# Altium PCB PCB4.PcbDoc
Units mil, origin at the board's own origin, x right, y up, seen from the top; angles counter-clockwise.
Board outline 6535.43 x 4330.71 mil, 2 copper layers (Top Layer, Bottom Layer); 138 components, 60 nets, 332 pads, 80 vias.
Unrouted connection lines stored in the file: 2.
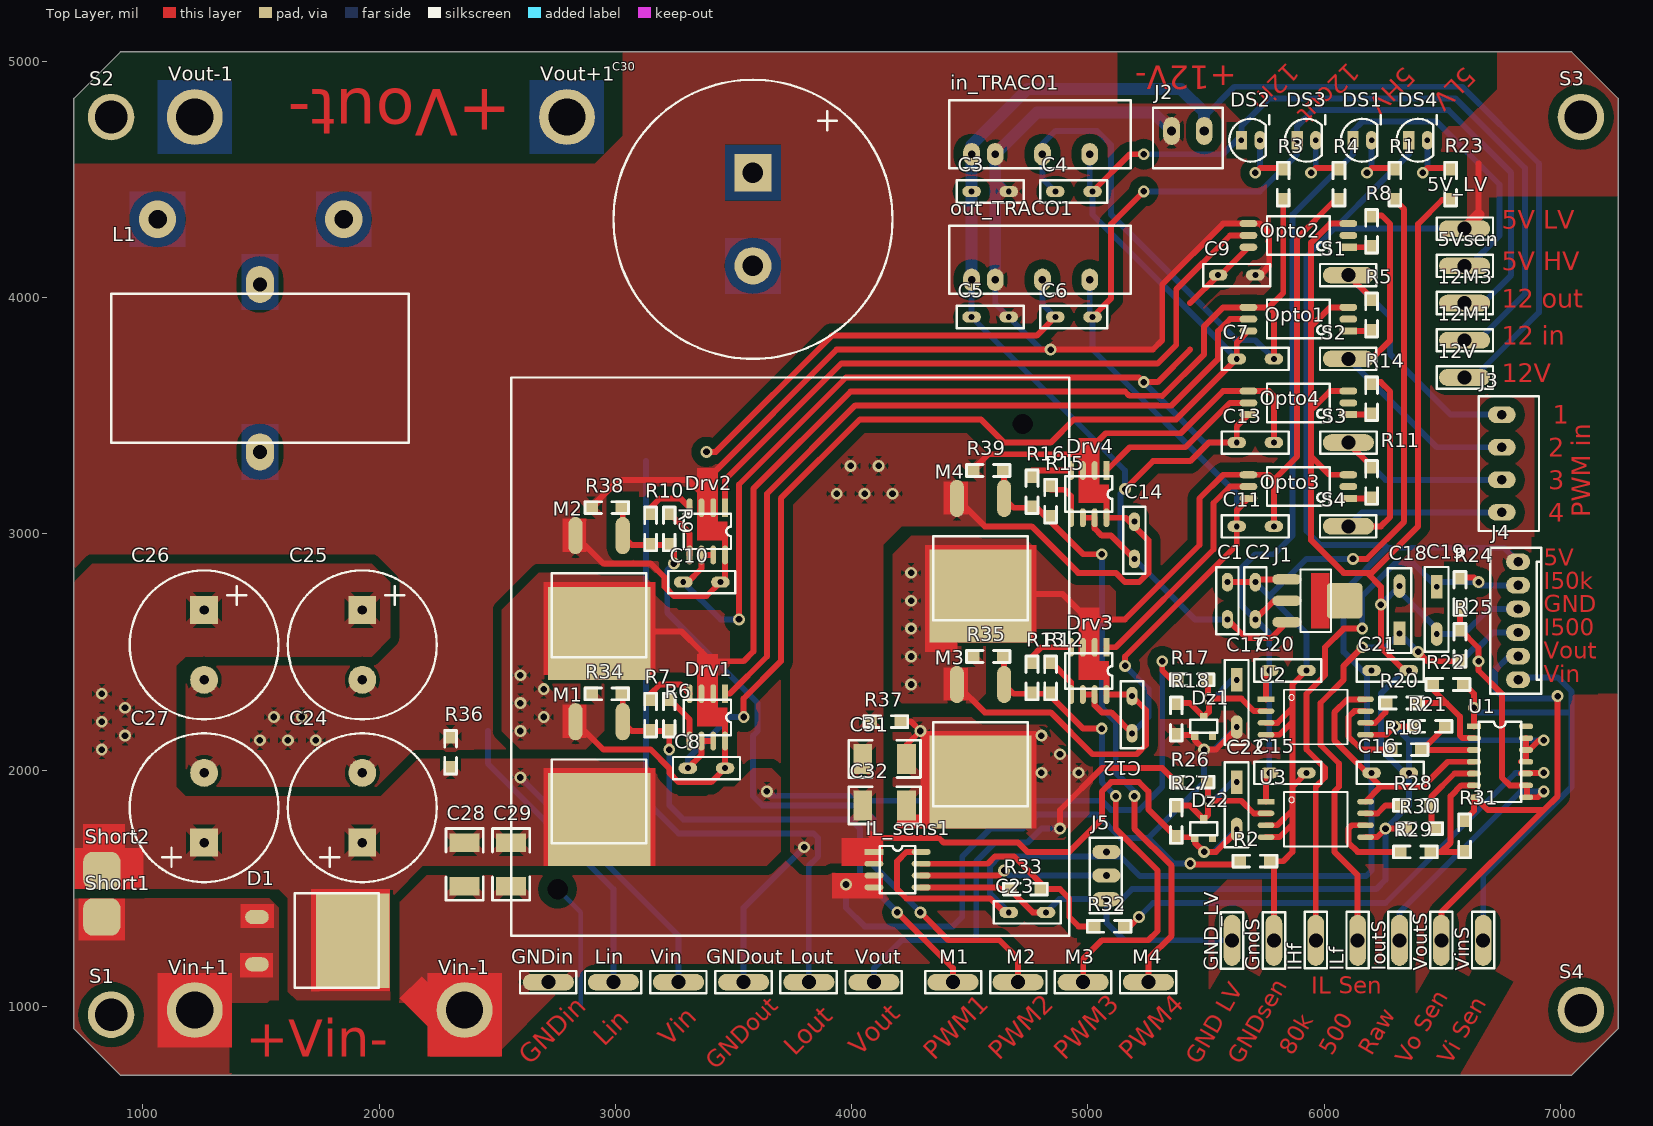
[diagram p0: Top Layer view]
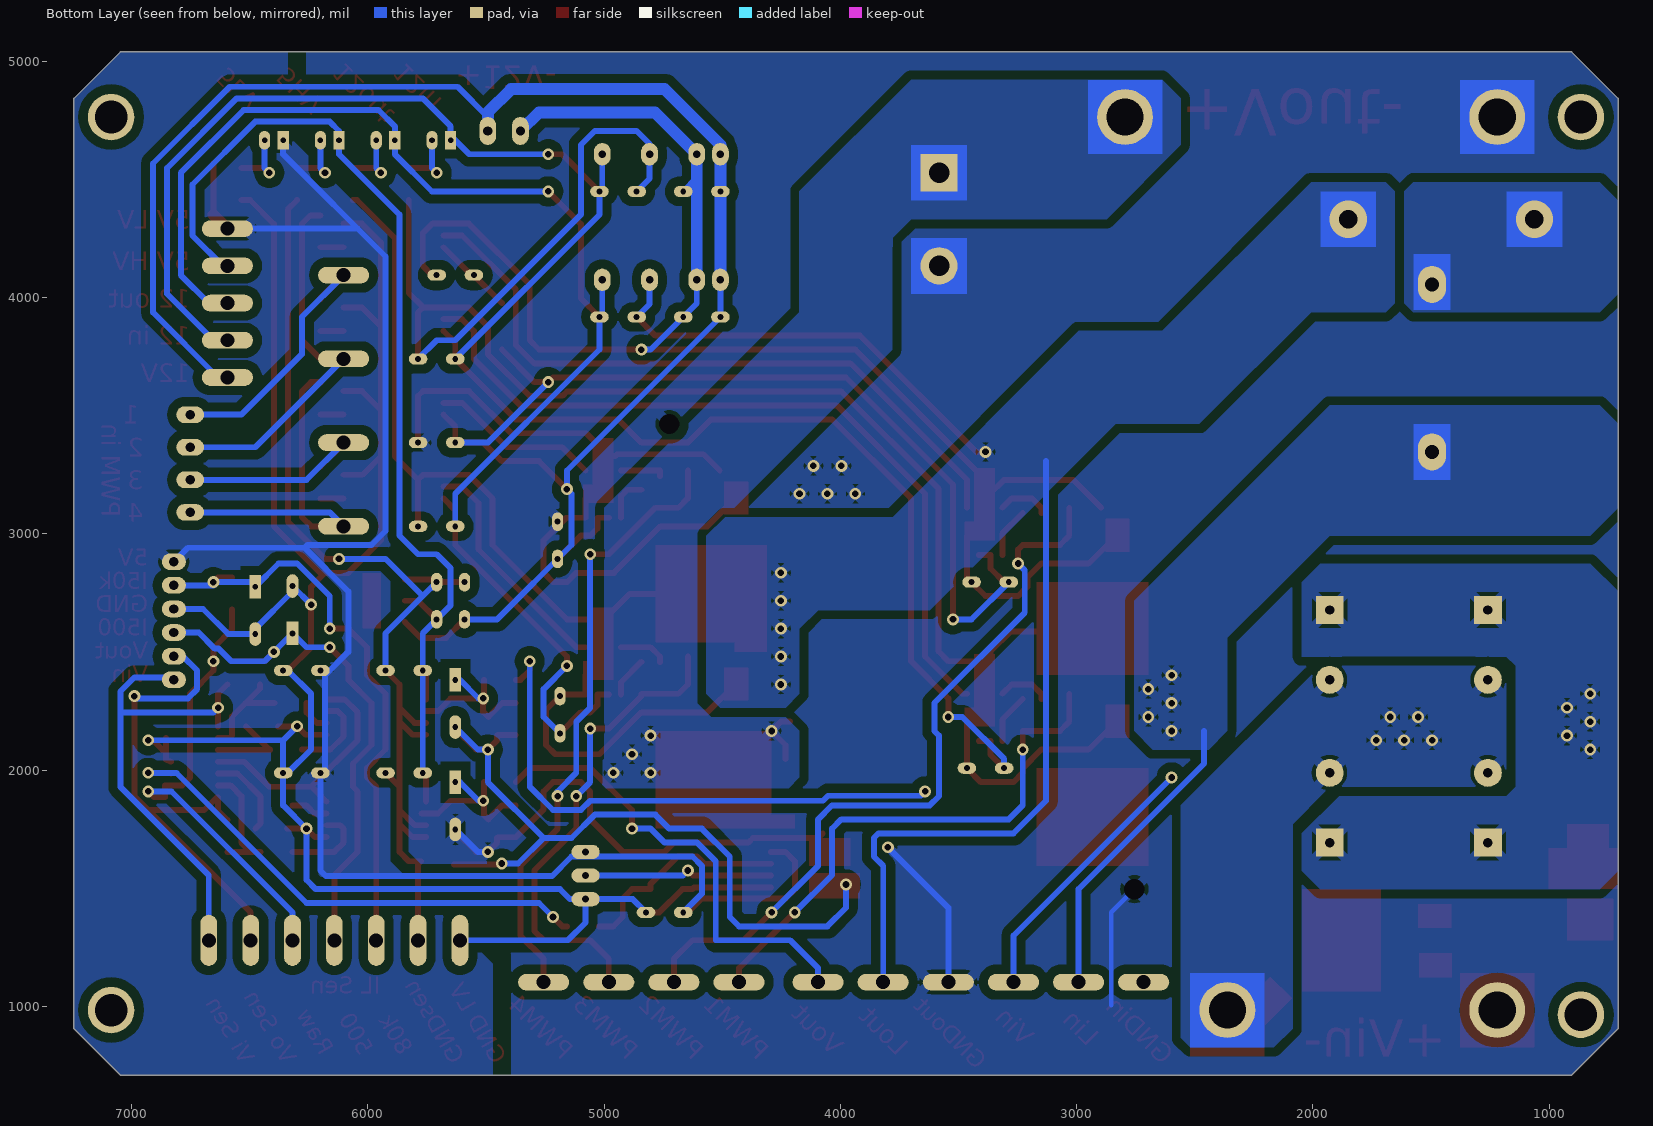
[diagram p1: Bottom Layer view, seen from below]

## Layer stack, top to bottom
Top Solder: solder mask 0.4, Solder Resist, Dk 3.5
Top Layer: signal copper 1.4
Dielectric 1: dielectric 12.6, FR-4, Dk 4.8
Bottom Layer: signal copper 1.4
Bottom Solder: solder mask 0.4, Solder Resist, Dk 3.5

## Board outline
708.66,4842.52 905.51,5039.37 7047.24,5039.37 7244.09,4842.52 7244.09,905.51 7047.24,708.66 905.51,708.66 708.66,905.51

## Design rules (kind name [scope] priority, off if disabled: settings)
Clearance "Polygon Pour" [InPolygon] p1: gap=39.37
Clearance [All] p2: gap=15.75
Clearance Defoult [InNet('No Net') And OnLayer('Top Layer')] p3: gap=15.75
PlaneConnect [All] p1: planeconnectstyle=Direct reliefexpansion=20 reliefentries=4 reliefconductorwidth=10 reliefairgap=10
PolygonConnect [All] p1: connectstyle=Relief reliefconductorwidth=39.37 reliefentries=4 polygonreliefangle="45 Angle" airgapwidth=15.75
RoutingVias [All] p1: holewidth=28 width=78.74 viastyle="Through Hole" minholewidth=28 minwidth=78.74 maxholewidth=28 maxwidth=78.74
SolderMaskExpansion [All] p1: expansion=4
UnConnectedPin [All] p1:
Width [All] p1: maxlimit=393.7 minlimit=19.68 preferedwidth=393.7
29 further rules are at their usual default settings.

## Classes and differential pairs
component class Switches: C24 C25 C26 C27 C28 C29 C30 C31 C32 D1 L1 M1 M2 M3 M4 R34 R35 R36 R37 R38 R39 S1 S2 S3 S4 Short1 Short2 Vin+1 Vin-1 Vout+1 Vout-1
component class Power_supplies: 5V_LV 5Vsen 12M1 12M3 12V C1 C2 C3 C4 C5 C6 DS1 DS2 DS3 GND_LV GNDin GNDout GndS in_TRACO1 J1 J2 Lin Lout out_TRACO1 R1 R2 R3 R4 Vin Vout
component class Drivers: C7 C8 C9 C10 C11 C12 C13 C14 C? Drv1 Drv2 Drv3 Drv4 IC? J3 M1 M2 M3 M4 Opto1 Opto2 Opto3 Opto4 R5 R6 R7 R8 R9 R10 R11 R12 R13 R14 R15 R16 S1 S2 S3 S4
component class Signal_processing: B? C15 C16 C17 C18 C19 C20 C21 C22 C23 DS4 Dz1 Dz2 IHf IL_sens1 ILf IoutS J4 J5 R17 R18 R19 R20 R21 R22 R23 R24 R25 R26 R27 R28 R29 R30 R31 R32 R33 U1 U2 U3 U? VinS VoutS

## Components (designator, comment, footprint, x,y, rotation, side; value= is the part's Value field where it differs from the comment)
5V_LV "Test Point" TEST_POINT 6594.49,4291.34 r270 top
5Vsen "Test Point" TEST_POINT 6594.49,4133.86 r270 top
12M1 "Test Point" TEST_POINT 6594.49,3818.9 r270 top
12M3 "Test Point" TEST_POINT 6594.49,3976.38 r270 top
12V "Test Point" TEST_POINT 6594.49,3661.42 r270 top
C1 "100nF" CAP100NF_AAU 5590.55,2795.28 r270 top
C2 "100nF" CAP100NF_AAU 5708.66,2795.28 r270 top
C3 "100nF" CAP100NF_AAU 4665.35,4448.82 r180 top
C4 "100nF" CAP100NF_AAU 5019.69,4448.82 r180 top
C5 "100nF" CAP100NF_AAU 4665.35,3917.32 r180 top
C6 "100nF" CAP100NF_AAU 5019.69,3917.32 r180 top
C7 "100nF" CAP100NF_AAU 5629.92,3740.16 r0 top
C8 "100nF" CAP100NF_AAU 3464.57,2007.87 r180 top
C9 "100nF" CAP100NF_AAU 5551.18,4094.49 r0 top
C10 "100nF" CAP100NF_AAU 3444.88,2795.28 r180 top
C11 "100nF" CAP100NF_AAU 5629.92,3031.5 r0 top
C12 "100nF" CAP100NF_AAU 5187.01,2312.99 r270 top
C13 "100nF" CAP100NF_AAU 5629.92,3385.83 r0 top
C14 "100nF" CAP100NF_AAU 5196.85,3051.18 r270 top
C15 "100nF" CAP100NF_AAU 5925.2,1988.19 r180 top
C16 "100nF" CAP100NF_AAU 6358.27,1988.19 r180 top
C17 "6.6nF" "CONDENSADOR_MKP_200MILIS - DUPLICATE" 5629.92,2381.89 r270 top
C18 "4.7nF" "CONDENSADOR_MKP_200MILIS - DUPLICATE" 6318.9,2578.74 r90 top
C19 "470pF" "CONDENSADOR_MKP_200MILIS - DUPLICATE" 6476.38,2775.59 r270 top
C20 "100nF" CAP100NF_AAU 5925.2,2421.26 r180 top
C21 "100nF" CAP100NF_AAU 6358.27,2421.26 r180 top
C22 "2.7nF" "CONDENSADOR_MKP_200MILIS - DUPLICATE" 5629.92,1948.82 r270 top
C23 "100nF" CAP100NF_AAU 4822.83,1397.64 r180 top
C24 "470µF" CE_16DX35MM_PITCH7.5MM 1929.13,1692.91 r90 top
C25 "470µF" CE_16DX35MM_PITCH7.5MM 1929.13,2677.17 r270 top
C26 "470µF" CE_16DX35MM_PITCH7.5MM 1259.84,2677.17 r270 top
C27 "470µF" CE_16DX35MM_PITCH7.5MM 1259.84,1692.91 r90 top
C28 "100nF" 1812 2362.2,1692.91 r270 top
C29 "1uF" 1812 2559.06,1692.91 r270 top
C30 "820µF" CE_30DX35MM_PITCH10MM 3582.68,4527.56 r270 top
C31 "100nF" 1812 4232.28,2047.24 r180 top
C32 "1uF" 1812 4232.28,1850.39 r180 top
D1 "????" "D2PAK - DIODE" 1483.47,1377.95 r270 top
Drv1 "NCP81074A" NCP81074A 3464.57,2322.83 r270 top
Drv2 "NCP81074A" NCP81074A 3464.57,3110.24 r270 top
Drv3 "NCP81074A" NCP81074A 5078.74,2519.69 r270 top
Drv4 "NCP81074A" NCP81074A 5078.74,3267.72 r270 top
DS1 "Verde" "LED 2MM" 6200.79,4665.35 r270 top
DS2 "Verde" "LED 2MM" 5728.35,4665.35 r270 top
DS3 "Verde" "LED 2MM" 5964.57,4665.35 r270 top
DS4 "Verde" "LED 2MM" 6437.01,4665.35 r270 top
Dz1 "4.7V" "SOT23 - ZENNER" 5452.76,2145.67 r0 top
Dz2 "4.7V" "SOT23 - ZENNER" 5452.76,1712.6 r0 top
GND_LV "Test Point" TEST_POINT 5610.24,1279.53 r180 top
GNDin "Test Point" TEST_POINT 2716.54,1102.36 r90 top
GNDout "Test Point" TEST_POINT 3543.31,1102.36 r90 top
GndS "Test Point" TEST_POINT 5787.4,1279.53 r180 top
IHf "Test Point" TEST_POINT 5964.57,1279.53 r0 top
IL_sens1 "ACS723LLCTR-20AB-T" SOIC8_GND 4094.49,1653.54 r0 top
ILf "Test Point" TEST_POINT 6141.73,1279.53 r0 top
in_TRACO1 "TRACO" TRACO_TMA1212S 4507.87,4606.3 r0 top
IoutS "Test Point" TEST_POINT 6318.9,1279.53 r0 top
J1 "LD1117" SOT-223_LM1117 5964.57,2716.54 r270 top
J2 "Cleva 2 vias" "CON2_EXTRON _3.5MMPITCH" 5354.33,4704.72 r0 top
J3 "CON4" "CON4_EXTRON _3.5MMPITCH" 6751.97,3090.55 r90 top
J4 "CON6" CON6_KK_256 6820.87,2381.89 r90 top
J5 "Cleva 2 vias" CON_3_100MILIS 5078.74,1653.54 r0 top
L1 "mH" TORUS_COIL_1MH 1496.06,3346.46 r90 top
Lin "Test Point" TEST_POINT 2992.13,1102.36 r90 top
Lout "Test Point" TEST_POINT 3818.9,1102.36 r90 top
M1 "Test Point" TEST_POINT 4429.13,1102.36 r270 top
M1 "MOSFET N" "D2PAK - MOSFET" 3031.5,2204.72 r180 top
M2 "MOSFET N" "D2PAK - MOSFET" 3031.5,2992.13 r180 top
M2 "Test Point" TEST_POINT 4704.72,1102.36 r270 top
M3 "MOSFET N" "D2PAK - MOSFET" 4645.67,2362.2 r180 top
M3 "Test Point" TEST_POINT 4980.31,1102.36 r90 top
M4 "MOSFET N" "D2PAK - MOSFET" 4645.67,3149.61 r180 top
M4 "Test Point" TEST_POINT 5255.91,1102.36 r90 top
Opto1 "ACPL-W70L" SSOIC6 6102.36,3858.27 r180 top
Opto2 "ACPL-W70L" SSOIC6 6102.36,4212.6 r180 top
Opto3 "ACPL-W70L" SSOIC6 6102.36,3149.61 r180 top
Opto4 "ACPL-W70L" SSOIC6 6102.36,3503.94 r180 top
out_TRACO1 "TRACO" TRACO_TMA1212S 4507.87,4074.8 r0 top
R1 "RK" 1206 6299.21,4547.24 r270 top
R2 "Res. Bridge" 1206 5639.76,1614.17 r0 top
R3 "RK" 1206 5826.77,4547.24 r270 top
R4 "RK" 1206 6062.99,4547.24 r270 top
R5 "560OHM" 1206 6200.79,3858.27 r90 top
R6 "25" 1206 3228.35,2165.35 r90 top
R7 "25" 1206 3149.61,2165.35 r90 top
R8 "560OHM" 1206 6200.79,4212.6 r90 top
R9 "560OHM" 1206 3228.35,2952.76 r90 top
R10 "560OHM" 1206 3149.61,2952.76 r90 top
R11 "560OHM" 1206 6200.79,3149.61 r90 top
R12 "560OHM" 1206 4842.52,2322.83 r90 top
R13 "560OHM" 1206 4763.78,2322.83 r90 top
R14 "560OHM" 1206 6200.79,3503.94 r90 top
R15 "560OHM" 1206 4842.52,3070.87 r90 top
R16 "560OHM" 1206 4763.78,3110.24 r90 top
R17 "47k" 1206 5374.02,2381.89 r0 top
R18 "2k" 1206 5374.02,2283.46 r270 top
R19 "11k" 1206 6279.53,2086.61 r0 top
R20 "11k" 1206 6259.84,2283.46 r0 top
R21 "27k" 1206 6515.75,2185.04 r180 top
R22 "27k" 1206 6456.69,2362.2 r0 top
R23 "RK" 1206 6535.43,4547.24 r270 top
R24 "6k8" 1206 6574.8,2814.96 r270 top
R25 "68k" 1206 6574.8,2460.63 r90 top
R26 "120k" 1206 5374.02,1948.82 r0 top
R27 "2k" 1206 5374.02,1850.39 r270 top
R28 "11k" 1206 6318.9,1850.39 r0 top
R29 "11k" 1206 6318.9,1653.54 r0 top
R30 "27k" 1206 6476.38,1751.97 r180 top
R31 "27k" 1206 6594.49,1653.54 r90 top
R32 "10k" 1206 5157.48,1338.58 r180 top
R33 "10k" 1206 4803.15,1496.06 r180 top
R34 "68K" 1206 3031.5,2322.83 r180 top
R35 "68K" 1206 4645.67,2480.32 r180 top
R36 "33K" 1206 2303.15,2007.87 r90 top
R37 "47K" 1206 4212.6,2204.72 r180 top
R38 "68K" 1206 3031.5,3110.24 r180 top
R39 "68K" 1206 4645.67,3267.72 r180 top
S1 "Support" SUPPORT 866.14,964.57 r0 top
S1 "Test Point" TEST_POINT 6102.36,4094.49 r90 top
S2 "Support" SUPPORT 866.14,4763.78 r0 top
S2 "Test Point" TEST_POINT 6102.36,3740.16 r90 top
S3 "Support" SUPPORT 7086.61,4763.78 r0 top
S3 "Test Point" TEST_POINT 6102.36,3385.83 r270 top
S4 "Support" SUPPORT 7086.61,984.25 r0 top
S4 "Test Point" TEST_POINT 6102.36,3031.5 r90 top
Short1 "CON1" SHORTPAD 826.77,1377.95 r90 top
Short2 "CON1" SHORTPAD 826.77,1574.8 r90 top
U1 "LMC6484IM" SOIC_14 6633.86,2185.04 r0 top
U2 "ACPL-C870-000E" SSOP8 5964.57,2224.41 r0 top
U3 "ACPL-C870-000E" SSOP8 5964.57,1791.34 r0 top
Vin "Test Point" TEST_POINT 3267.72,1102.36 r90 top
Vin+1 "CON1" POWERHOLE 1220.47,984.25 r0 top
Vin-1 "CON1" POWERHOLE 2362.2,984.25 r0 top
VinS "Test Point" TEST_POINT 6673.23,1279.53 r0 top
Vout "Test Point" TEST_POINT 4094.49,1102.36 r90 top
Vout+1 "CON1" POWERHOLE 2795.28,4763.78 r0 top
Vout-1 "CON1" POWERHOLE 1220.47,4763.78 r0 top
VoutS "Test Point" TEST_POINT 6496.06,1279.53 r0 top

## Footprints (in the part's own frame and the unit in brackets; to place one, negate y for a bottom-side part, rotate by r counter-clockwise, add the part's x,y. Pads: shape width x height; smd on the part's side, far side on the other; paste and mask are expansions set on the pad)
1206 [mil] "SMD R&C"
  rect 60x60 smd: 1(0,0) 2(135,0)
  silkscreen extent -25,-25 160,25, body extent 2,-31 128,31
1812 [mm]
  rect 2x3.2 smd: 1(0,0) 2(4.7,0)
  silkscreen extent -1.5,-2 6.2,2
CAP100NF_AAU [mm] "10nF 1600v"
  oval 2x1.2 hole 0.635: 1(0,0) 2(4,0)
  silkscreen extent -1.6,-1.2 5.6,1.2
CE_16DX35MM_PITCH7.5MM [mm]
  rect 3x3 hole 1: 1(0,0)
  round 3 hole 1: 2(7.5,0)
  silkscreen extent -4.25,-8 11.75,8
CE_30DX35MM_PITCH10MM [mm]
  rect 4x4 hole 2.2: 1(0,0)
  round 4 hole 2.2: 2(10,0)
  silkscreen extent -10,-15 20,15
"CON2_EXTRON _3.5MMPITCH" [mm]
  oval 1.8x3 hole 1: 1(0,0) 2(3.5,0)
  silkscreen extent -2,-4 5.5,2.5
"CON4_EXTRON _3.5MMPITCH" [mm]
  oval 1.8x3 hole 1: 1(0,0) 2(3.5,0) 3(7,0) 4(10.5,0)
  silkscreen extent -2,-4 12.5,2.5
CON6_KK_256 [mm]
  oval 1.8x2.6 hole 1: 1(0,0) 2(2.54,0) 3(5.08,0) 4(7.62,0) 5(10.16,0) 6(12.7,0)
  silkscreen extent -1.5,-2.5 14.2,3
CON_3_100MILIS [mil]
  oval 120x60 hole 29.53: 1(0,0) 2(0,-100) 3(0,-200)
  silkscreen extent -70,-260 65,60
"CONDENSADOR_MKP_200MILIS - DUPLICATE" [mil] "10nF 1600v"
  rect 100x50 hole 25: 1(0,0)
  oval 100x50 hole 25: 2(200,0)
  silkscreen extent -84,-50 275,50
"D2PAK - DIODE" [mil] "TO220-superficie"
  oval 60x100 smd: A(0,0) A(200,0)
  rect 400x310 smd: K(100,405)
  silkscreen extent -100,160 300,515
"D2PAK - MOSFET" [mm] "TO220-superficie"
  rect 11x10 smd: D(2.54,10.5)
  oval 1.524x4 smd: G(0,0) S(5.08,0)
  silkscreen extent -2.54,4.06 7.62,13.08
"LED 2MM" [mm] "no está modificado"
  rect 2x1.2 hole 0.6: A(0,-2)
  oval 2x1.2 hole 0.6: K(0,0)
  silkscreen extent -2.72,-3.3 2.3,1
NCP81074A [mil] "Driver"
  rect 80x25 smd: 1(0,0)
  oval 80x25 smd: 2(0,-50) 3(0,-100) 4(0,-150) 5(200,-150) 6(200,-100) 7(200,-50) 8(200,0)
  silkscreen extent 25,-175 175,25
POWERHOLE [mm]
  round 6 hole 4: 1(0,0)
SHORTPAD [mm]
  rrect50% 4x4 smd: 1(0,0)
SOIC8_GND [mil] "Con plano de masa inferior"
  rect 80x25 smd: 1(0,0)
  oval 80x25 smd: 2(0,-50) 3(0,-100) 4(0,-150) 5(200,-150) 6(200,-100) 7(200,-50) 8(200,0)
  silkscreen extent 25,-175 175,25
SOIC_14 [mil]
  rect 60x24 smd: 1(0,0)
  oval 60x24 smd: 2(0,-50) 3(0,-100) 4(0,-150) 5(0,-200) 6(0,-250) 7(0,-300) 8(220.47,-300) 9(220.47,-250) 10(220.47,-200) 11(220.47,-150) 12(220.47,-100) 13(220.47,-50) 14(220.47,0)
  silkscreen extent 20,-320 201,20
"SOT23 - ZENNER" [mm] "Transistor SMD"
  rect 0.8x0.9 smd: A(0,0) K(0.95,2) NC(1.9,0)
  silkscreen extent -0.5,0.3 2.4,1.7
SOT-223_LM1117 [mm] "SOT-223/SC-73; 4 Leads; Body 6.7 x 7.3 mm, inc. leads (LxW max)"
  oval 1.1x3.15 smd: 1(-2.3,-3.1) 2(0,-3.1) 3(2.3,-3.1)
  rrect20% 3.8x3.8 smd: ""(0,3.1)
  silkscreen extent -3.35,-1.63 3.35,1.63
SSOIC6 [mm] "Circuito de 6 patas SMD"
  rect 1.91x0.762 smd: 1(0,0)
  oval 1.91x0.762 smd: 2(0,-1.27) 3(0,-2.54) 4(10.74,-2.54) 5(10.74,-1.27) 6(10.74,0)
  silkscreen extent 2,-3.34 8.74,0.8
SSOP8 [mm]
  rect 1.8x0.6 smd: 1(-5.35,1.905)
  oval 1.8x0.6 smd: 2(-5.35,0.635) 3(-5.35,-0.635) 4(-5.35,-1.905) 5(5.35,-1.905) 6(5.35,-0.635) 7(5.35,0.635) 8(5.35,1.905)
  silkscreen extent -3.4,-2.93 3.4,2.93
SUPPORT [mm]
  round 5 hole 3.5: ""(0,0)
TEST_POINT [mm]
  oval 1.8x5.5 hole 1.5: 1(0,0)
  silkscreen extent -1.2,-3 1.2,3.05
TORUS_COIL_1MH [mm]
  oval 4x3 hole 1.5: 1(0,0) 2(18,0)
  silkscreen extent 1,-16 17,16
TRACO_TMA1212S [mm]
  oval 1.8x2.4 hole 0.8: 1(0,0) 2(2.54,0) 4(7.62,0) 6(12.7,0)
  silkscreen extent -2.4,-1.5 17.1,5.8

## Part data
C1 C2 C3 C4 C5 C6 C7 C8 C9 C10 C11 C12 C13 C14 C15 C16 C17 C18 C19 C20 C21 C22 C23 C28 C29 C31 C32: library part Condensador, "Condensador"
C24 C25 C26 C27 C30: library part Cond_Electrolítico, "Condensador Aluminio con polaridad"
D1: library part Diodo, "Diodo"
DS1 DS2 DS3 DS4: library part Led
Dz1 Dz2: library part Zener
IL_sens1: "Current Sensor AC/DC 5V 8-Pin SOIC N Allegro Microsystems ACS723LLCTR-20AB-T, Current Sensor, 8-Pin, SOIC"
in_TRACO1 out_TRACO1: "TracoPower TMA1212S"
J1: "Linear voltage regulator"
J2: library part Con_2
J4: "CONECTOR 6 PINES"
J5: library part Con_3
L1: library part Bobina
M1 M2 M3 M4: "MOSFET de canal N"
R1 R3 R4 R5 R6 R7 R8 R9 R10 R11 R12 R13 R14 R15 R16 R17 R18 R19 R20 R21 R22 R23 R24 R25 R26 R27 R28 R29 R30 R31 R32 R33 R34 R35 R36 R37 R38 R39: library part Resistencia, "Resistencia"
R2: "Resistencia Bridge"
U1: library part LMC6484IM_1, "14 pin CMOS Quad Rail to Rail Input and Output Operational Amplifier 55 per tube"
U2 U3: "Isolation Amplifier [Broadcom] ACPL-C870-000E Isolation Amplifier"

## Free pads (board coordinates)
  round 20 hole 86.61: 2(2755.91,1496.06) 2(4724.41,3464.57)

## Via types
v1: diameter 50, hole 28, Top Layer to Bottom Layer, 78 vias
v2: diameter 157.48, hole 78.74, Top Layer to Bottom Layer, 2 vias

## Nets (pads, with @x,y where several pads share a name; then routed paths per layer and width w, separated by ;. In a path a pad name is that pad's centre, name@x,y a point inside that pad or via, vN(x,y) a via of type N, cw(c..) or ccw(c..) an arc to the next point about the centre after c; other vN are vias at no path point)
5V_HV: 5Vsen.1 C2.2 C15.2 C20.2 DS1.A J1.2 U2.1 U3.1 | length 4553.1
  Top Layer w25: C2.2 5787.4,2716.54 J1.2 ; U3.1 5753.94,1974.41 C15.2 ; U2.1 5753.94,2407.48 C20.2
  Bottom Layer w25: C15.2 C20.2 5767.72,2578.74 C2.2 5649.61,2696.85 5649.61,2854.33 5708.66,2913.39 5787.4,2913.39 5866.14,2992.13 5866.14,4350.39 6122.05,4606.3 DS1.A@6122.05,4625.98 ; DS1.A 6122.05,4704.72 6161.42,4744.09 6476.38,4744.09 6742.13,4478.35 6742.13,4261.81 6614.17,4133.86 5Vsen.1
5V_LV: 5V_LV.1 C16.2 C21.2 C23.2 DS4.A IL_sens1.8 J4.6 J5.1 U1.4 U2.8 U3.8 | length 8929.5
  Top Layer w25: IL_sens1.8 4232.28,1653.54 4192.91,1614.17 4192.91,1496.06 4232.28,1456.69 4586.61,1456.69 4645.67,1397.64 C23.2 ; U2.8 6098.62,2299.41 6043.31,2244.09 6043.31,2125.98 6239.07,1930.22 U3.8 6237.99,1929.13 6417.32,1929.13 6523.23,2035.04 U1.4 ; 6653.54,4350.39 6653.54,4566.93
  Top Layer w50: 5V_LV.1 6653.54,4350.39
  Bottom Layer w25: C23.2 4586.61,1476.38 4586.61,1594.49 4625.98,1633.86 5137.8,1633.86 5220.57,1551.08 6177.07,1551.08 6200.79,1574.8 6200.79,1968.5 6181.1,1988.19 6181.1,2401.57 6082.68,2500 6082.68,2755.91 6267.72,2940.95 ; 6043.31,4291.34 5V_LV.1 ; DS4.A@6358.27,4625.98 6358.27,4606.3 5925.2,4173.23 5925.2,3011.81 5984.25,2952.76 6255.91,2952.76 6267.72,2940.95 ; J4.6@6842.52,2881.89 J4.6 6761.81,2940.95 6267.72,2940.95
12V_HV_HS_IN: 12M1.1 C4.1 C7.1 C8.2 Drv1.6 Drv1.7 DS2.A in_TRACO1.6 Opto1.6 | length 8073.7
  Top Layer w25: C8.2 3364.57,2065.35 Drv1.6 Drv1.7 ; v1(3543.31,2224.41) 3543.31,2303.15 3700.79,2460.63 3700.79,3149.61 4035.43,3484.25 4547.24,3484.25 4645.67,3385.83 4842.52,3385.83 4940.94,3484.25 5374.02,3484.25 C7.1 5629.92,3808.66 Opto1.6 ; C4.1 5177.17,4606.3 v1(5236.22,4606.3)
  Bottom Layer w25: C8.2 3307.09,2047.24 3484.25,2224.41 v1(3543.31,2224.41) ; in_TRACO1.6 5007.87,4460.63 C4.1 5019.69,4350.39 C7.1 ; v1(5236.22,4606.3) 5570.87,4606.3 DS2.A@5649.61,4685.04 ; DS2.A 5649.61,4724.41 5767.72,4842.52 6555.12,4842.52 6850.39,4547.24 6850.39,4015.75 6653.54,3818.9 12M1.1
12V_HV_HS_OUT: 12M3.1 C6.1 C11.1 C12.2 Drv3.6 Drv3.7 DS3.A Opto3.6 out_TRACO1.6 | length 6001.5
  Top Layer w25: Drv3.6 Drv3.7 5028.74,2274.41 5059.06,2244.09 5098.43,2244.09 C12.2 ; C6.1 5098.43,3996.06 5098.43,4311.02 v1(5236.22,4448.82) ; v1(5157.48,2440.94) 5157.48,2480.32 5629.92,2952.76 C11.1 5629.92,3100 Opto3.6
  Bottom Layer w25: out_TRACO1.6 5007.87,3929.13 C6.1 5019.69,3779.53 5629.92,3169.29 C11.1 ; v1(5157.48,2440.94) 5255.91,2342.52 5255.91,2224.41 C12.2 ; v1(5236.22,4448.82) 5728.35,4448.82 5885.83,4606.3 DS3.A 5885.83,4724.41 5954.72,4793.31 6525.59,4793.31 6791.34,4527.56 6791.34,4094.49 12M3.1@6673.23,3976.38 ; 12M3.1 12M3.1@6614.17,3976.38
12V_HV_LS: 12V.1 C1.2 C3.2 C5.2 C9.1 C10.2 C13.1 C14.2 Drv2.6 Drv2.7 Drv4.6 Drv4.7 in_TRACO1.1 J1.3 J2.2 Opto2.6 Opto4.6 out_TRACO1.1 | length 11753
  Top Layer w25: C10.2@3307.09,2795.28 3364.57,2852.76 Drv2.6 Drv2.7 ; v1(3523.62,2637.8) 3523.62,3208.66 3976.38,3661.42 5216.54,3661.42 v1(5236.22,3641.73) 5295.28,3641.73 5433.07,3779.53 ; Drv4.6 Drv4.7 5028.74,3022.44 5059.06,2992.13 5098.43,2992.13 C14.2 ; v1(5157.48,3188.98) 5275.59,3307.09 5433.07,3307.09 5511.81,3385.83 C13.1 5629.92,3454.33 Opto4.6 ; 5433.07,3976.38 C9.1 ; C9.1@5551.18,4084.25 Opto2.6 ; C1.2 5669.29,2559.06 5775.59,2559.06 J1.3
  Bottom Layer w25: C10.2 3444.88,2637.8 v1(3523.62,2637.8) ; out_TRACO1.1 C5.2 5157.48,3267.72 v1(5157.48,3188.98) 5137.8,3169.29 5137.8,2952.76 5452.76,2637.8 C1.2 ; v1(5236.22,3641.73) 5492.13,3385.83 C13.1 ; 5492.13,4763.78 5620.08,4891.73 6584.65,4891.73 6909.45,4566.93 6909.45,3937.01 6633.86,3661.42 12V.1
  Bottom Layer w50: out_TRACO1.1 C3.2 in_TRACO1.1 4507.87,4645.67 4744.09,4881.89 5393.7,4881.89 5492.13,4783.46 5492.13,4763.78
GND_HV_HS_IN: C4.2 C7.2 C8.1 Drv1.2 Drv1.3 Drv1.8 in_TRACO1.4 L1.1 Lin.1 M1.S M2.D Opto1.4 R3.2 R34.2 | length 9121.8
  Top Layer w25: M1.S 2949.61,2086.61 3149.61,2086.61 3228.35,2007.87 3228.35,1988.19 3267.72,1948.82 3405.51,1948.82 C8.1 Drv1.8 3464.57,2204.72 3414.57,2254.72 Drv1.2 Drv1.3 3364.57,2501.57 ; M2.D@2931.5,2587.13 3279.02,2587.13 3364.57,2501.57 ; 5313.58,3584.06 5175.79,3584.06 5157.48,3602.36 3996.06,3602.36 3584.06,3190.35 3584.06,2501.38 3543.31,2460.63 3405.51,2460.63 3364.57,2501.57 ; 5314.96,3582.68 5492.13,3759.84 5492.13,3877.95 5572.44,3958.27 Opto1.4 5766.14,3958.27 ; C7.2 5787.4,3937.01 5766.14,3958.27 ; R3.2 5826.77,4018.9 5766.14,3958.27
  Bottom Layer w25: 2460.63,2165.35 2460.63,2027.56 2992.13,1496.06 Lin.1 ; C4.2 4807.87,4503.15 in_TRACO1.4 4807.87,4650.39 4862.2,4704.72 5039.37,4704.72 5098.43,4645.67 5098.43,4350.39 5629.92,3818.9 5708.66,3818.9 C7.2
  other v1: 2598.43,2165.35 2696.85,2224.41 2598.43,2283.46 2696.85,2342.52 2598.43,2401.57
GND_HV_HS_OUT: C6.2 C11.2 C12.1 Drv3.2 Drv3.3 Drv3.8 L1.2 Lout.1 M3.S M4.D Opto3.4 out_TRACO1.4 R4.2 R35.2 | length 9609.5
  Top Layer w25: v1(3385.83,3346.46) 3425.2,3346.46 3917.32,3838.58 4783.46,3838.58 C6.2 ; M3.S 4563.78,2244.09 4842.52,2244.09 5019.69,2066.93 5206.69,2066.93 5246.06,2106.3 5246.06,2253.94 5180.31,2319.69 Drv3.8 5078.74,2401.57 5028.74,2451.57 Drv3.2 Drv3.3 4978.74,2659.06 ; M4.D@4545.67,2744.61 4893.19,2744.61 4978.74,2659.06 ; C11.2 5787.4,3228.35 ; R4.2 6046.1,4412.24 5885.83,4251.97 5885.83,3326.77 5787.4,3228.35 ; 4978.74,2659.06 5000,2637.8 5157.48,2637.8 5472.44,2952.76 5472.44,3149.61 5572.44,3249.61 Opto3.4 5766.14,3249.61 5787.4,3228.35
  Bottom Layer w25: 3129.92,3307.09 3129.92,1870.08 3267.72,1732.28 3838.58,1732.28 3858.27,1712.6 3858.27,1633.86 3818.9,1594.49 Lout.1 ; out_TRACO1.4 4807.87,3971.65 C6.2
  other v1: 4251.97,2362.2 4251.97,2480.32 4251.97,2598.43 4251.97,2716.54 4251.97,2834.65
  other v2: 1062.99,4330.71 1850.39,4330.71
GND_HV_LS_IN: C3.1 C5.1 C9.2 C10.1 C17.2 C24.2 C25.2 C26.2 C27.2 C28.2 C29.2 Drv2.2 Drv2.3 Drv2.8 Dz1.A GNDin.1 IL_sens1.3 IL_sens1.4 in_TRACO1.2 J2.1 M2.S Opto2.4 out_TRACO1.2 R2.1 R18.2 R36.2 R38.2 Vin-1.1 | length 10117.9
  Top Layer w25: M2.S 2949.61,2874.02 3149.61,2874.02 3208.66,2814.96 3208.66,2775.59 3248.03,2736.22 3385.83,2736.22 C10.1 3464.57,2814.96 Drv2.8 3464.57,2992.13 3414.57,3042.13 Drv2.2 Drv2.3 3364.57,3170.87 ; R38.2 3014.61,3228.35 3307.09,3228.35 3364.57,3170.87 ; R18.2 5449.96,2148.46 Dz1.A 5452.76,2125.98 v1(5492.13,2086.61) 5541.92,2086.61 5629.92,2174.62 C17.2 ; v1(5433.07,1604.33) 5437.11,1600.3 R2.1@5635.73,1600.3 ; C9.2 5728.35,4094.49 5767.72,4133.86 5767.72,4271.65 5726.77,4312.6 Opto2.4 5572.44,4312.6 5314.96,4055.12 5314.96,3818.9 5275.59,3779.53 3937.01,3779.53 3405.51,3248.03 3405.51,3211.81 3364.57,3170.87
  Bottom Layer w25: v1(3976.38,1515.75) 3976.38,1417.32 4055.12,1338.58 4429.13,1338.58 4468.5,1377.95 4468.5,1633.86 4586.61,1751.97 4724.41,1751.97 4783.46,1811.02 5039.37,1811.02 5137.8,1712.6 5255.91,1712.6 ; out_TRACO1.2 4607.87,3974.8 C5.1 4803.15,3779.53 v1(4842.52,3779.53) ; 4607.87,4506.3 C3.1 ; v1(5433.07,1604.33) 5364.17,1604.33 5255.91,1712.6 ; C17.2 5534.65,2086.61 v1(5492.13,2086.61) 5492.13,1948.82 5255.91,1712.6
  Bottom Layer w50: out_TRACO1.2 4607.87,4506.3 in_TRACO1.2 4785.04,4783.46 5275.59,4783.46 J2.1
  other v1: 1496.06,2125.98 1614.17,2125.98 1732.28,2125.98 1555.12,2224.41 1673.23,2224.41
GND_HV_LS_OUT: C13.2 C14.1 C22.2 C30.2 C31.2 C32.2 Drv4.2 Drv4.3 Drv4.8 Dz2.A GNDout.1 IL_sens1.1 IL_sens1.2 M4.S Opto4.4 pad.2 R27.2 R37.2 R39.2 Vout-1.1 | length 6675.9
  Top Layer w25: 4074.8,1732.28 4094.49,1712.6 4370.08,1712.6 4389.76,1692.91 4704.72,1692.91 4744.09,1653.54 4921.26,1653.54 5059.06,1791.34 5059.06,1909.45 5098.43,1948.82 5216.54,1948.82 5255.91,1909.45 5255.91,1833.5 R27.2 5449.96,1715.39 Dz2.A 5452.76,1692.91 v1(5492.13,1653.54) 5541.92,1653.54 5629.92,1741.55 C22.2 ; M4.S 4563.78,3031.5 4762.26,3031.5 4959.11,2834.65 5118.11,2834.65 5157.48,2795.28 5216.54,2795.28 5255.91,2834.65 5255.91,2972.44 5160.63,3067.72 Drv4.8 5078.74,3149.61 5028.74,3199.61 Drv4.2 Drv4.3 4978.74,3328.35 ; R39.2 4579.57,3336.61 4944.97,3336.61 4953.24,3328.35 4978.74,3328.35 ; C13.2 5787.4,3582.68 5766.14,3603.94 Opto4.4 5572.44,3603.94 5393.7,3425.2 5075.59,3425.2 4978.74,3328.35
  Bottom Layer w19.68: pad.2@2755.91,1496.06 2854.33,1397.64 2854.33,1003.94
  Bottom Layer w25: GNDout.1 3543.31,1417.32 v1(3799.21,1673.23) ; v1(5492.13,1653.54) 5534.65,1653.54 C22.2
  other v1: 3937.01,3169.29 4055.12,3169.29 4173.23,3169.29 3996.06,3287.4 4114.17,3287.4
GND_HV_SENSORS: C1.1 C2.1 C15.1 C20.1 GndS.1 J1.1 R1.2 R2.2 U2.3 U2.4 U3.3 U3.4 | length 4660.7
  Top Layer w25: C1.1 C2.1 5720.47,2807.09 J1.1 ; U3.4 5810.83,1716.34 5866.14,1771.65 ; U3.3 5801.77,1766.34 5866.14,1830.71 ; U2.4 5810.83,2149.41 5866.14,2204.72 ; U2.3 5801.77,2199.41 5866.14,2263.78 ; GndS.1@5787.4,1289.37 5787.4,1601.54 R2.2 5826.77,1614.17 5866.14,1653.54 5866.14,1771.65 ; C15.1 5866.14,1929.13 ; C20.1 5866.14,2362.2 5866.14,2263.78 ; v1(6122.05,2893.7) 6181.1,2893.7 6338.58,3051.18 6338.58,4372.87 R1.2 ; 5866.14,1771.65 5866.14,1830.71 ; 5866.14,1830.71 5866.14,1929.13 ; 5866.14,1929.13 5866.14,2204.72 ; 5866.14,2204.72 5866.14,2263.78
  Bottom Layer w25: C2.1 5767.72,2736.22 ; C20.1 5925.2,2578.74 5767.72,2736.22 ; v1(6122.05,2893.7) 5925.2,2893.7 5767.72,2736.22
GND_LV: C16.1 C18.2 C19.2 C21.1 C23.1 GND_LV.1 IL_sens1.5 J4.4 J5.3 Opto1.3 Opto2.3 Opto3.3 Opto4.3 R21.2 R23.2 R30.2 R33.2 U1.11 U1.12 U1.13 U2.5 U3.5 | length 10431.2
  Top Layer w25: IL_sens1.5 4618.5,1503.54 4625.98,1496.06 R33.2 4766.57,1397.64 C23.1 ; 5944.88,3326.77 6022.05,3249.61 Opto3.3 ; 5944.88,3523.62 6025.2,3603.94 Opto4.3 ; Opto1.3 6025.2,3958.27 5944.88,3877.95 ; Opto2.3 6025.2,4312.6 5944.88,4232.28 5944.88,3877.95 ; U3.5 6224.21,1716.34 v1(6259.84,1751.97) R30.2 ; U2.5 6263.58,2149.41 v1(6299.21,2185.04) R21.2 ; C21.1@6338.58,2421.26 6240.16,2519.68 v1(6240.16,2700) 6240.16,2775.59 6181.1,2834.65 ; R23.2 6498.86,4412.24 6397.64,4311.02 6397.64,3031.5 6200.79,2834.65 6181.1,2834.65 ; U1.11@6833.86,2035.04 6853.54,2043.6 U1.13@6853.54,2135.04 ; U1.12@6853.54,2085.04 6868.5,2085.04 6909.45,2125.98 v1(6929.13,2125.98) ; 5944.88,3877.95 5944.88,2972.44 6082.68,2834.65 6181.1,2834.65
  Bottom Layer w25: C23.1 4878.74,1453.54 J5.3 ; GND_LV.1 5153.54,1279.53 5078.74,1354.33 J5.3 ; v1(6240.16,2700) C18.2 ; v1(6299.21,2185.04) 6358.27,2125.98 ; C18.2@6318.9,2755.91 6476.38,2598.43 C19.2 6591.34,2575.59 6697.64,2681.89 J4.4 ; C16.1@6338.58,1988.19 6240.16,2086.61 6240.16,2322.83 C21.1@6338.58,2421.26 ; v1(6929.13,2125.98) 6358.27,2125.98 ; J5.3 5144.49,1453.54 5187.01,1496.06 6220.47,1496.06 6259.84,1535.43 v1(6259.84,1751.97) 6358.27,1850.39 C16.1 6358.27,2125.98
NetC18_1: C18.1 ILf.1 J4.3 R25.1 | length 2365.8
  Top Layer w25: ILf.1@6141.73,1289.37 6141.73,1555.12 6043.31,1653.54 6043.31,1909.45 6062.99,1929.13 6062.99,2027.56 5984.25,2106.3 5984.25,2283.46 6082.68,2381.89 6082.68,2440.94 v1(6161.42,2519.68) ; v1(6397.64,2500) 6437.01,2460.63 R25.1
  Bottom Layer w25: v1(6161.42,2519.68) 6259.84,2519.68 C18.1 6437.01,2460.63 6578.24,2460.63 6631.49,2513.88 6647.74,2513.88 6715.75,2581.89 6811.02,2581.89 J4.3@6820.87,2591.73
NetC19_1: C19.1 IHf.1 J4.5 R24.1 | length 2500.5
  Top Layer w25: IHf.1@5964.57,1289.37 5964.57,1929.13 6003.94,1968.5 6003.94,2007.87 5925.2,2086.61 5925.2,2322.83 6003.94,2401.57 6003.94,2519.68 6082.68,2598.43 v1(6161.42,2598.43) ; R24.1 6633.86,2814.96 v1(6653.54,2795.28)
  Bottom Layer w25: v1(6161.42,2598.43) 6161.42,2736.22 6299.21,2874.02 6377.95,2874.02 C19.1 6496.06,2795.28 v1(6653.54,2795.28) 6653.54,2781.89 6799.21,2781.89 J4.5@6811.02,2793.7
NetD1_A: D1.A Short1.1 Vin+1.1
NetDrv1_1: Drv1.1 Opto1.5 | length 3345.6
  Top Layer w25: Drv1.1 3484.25,2322.83 3641.73,2480.31 3641.73,3169.29 4015.75,3543.31 5296.7,3543.31 5298.08,3541.93 5352.95,3541.93 5551.18,3740.16 5551.18,3858.27 5601.18,3908.27 Opto1.5
NetDrv1_4: Drv1.4 R7.2 | length 220.1
  Top Layer w25: R7.2 3149.61,2322.83 3188.98,2362.2 3275.2,2362.2 Drv1.4
NetDrv1_5: Drv1.5 R6.2 | length 213.2
  Top Layer w25: R6.2 3314.57,2214.13 Drv1.5
NetDrv2_1: Drv2.1 Opto2.5 | length 2899.8
  Top Layer w25: Drv2.1 3464.57,3228.35 3956.69,3720.47 5295.28,3720.47 5374.02,3799.21 5374.02,4035.43 5601.18,4262.6 Opto2.5
NetDrv2_4: Drv2.4 R10.2 | length 220.1
  Top Layer w25: R10.2 3149.61,3110.24 3188.98,3149.61 3275.2,3149.61 Drv2.4
NetDrv2_5: Drv2.5 R9.2 | length 213.2
  Top Layer w25: R9.2 3314.57,3001.54 Drv2.5
NetDrv3_1: Drv3.1 Opto3.5 | length 997.7
  Top Layer w25: Drv3.1 5118.11,2519.69 5531.5,2933.07 5531.5,3129.92 5601.18,3199.61 Opto3.5
NetDrv3_4: Drv3.4 R13.2 | length 203.7
  Top Layer w25: R13.2 4763.78,2480.32 4803.15,2519.69 Drv3.4
NetDrv3_5: Drv3.5 R12.2 | length 173.9
  Top Layer w25: R12.2 4928.74,2371.61 Drv3.5
NetDrv4_1: Drv4.1 Opto4.5 | length 719.3
  Top Layer w25: Drv4.1 5177.17,3366.14 5413.39,3366.14 5601.18,3553.94 Opto4.5
NetDrv4_4: Drv4.4 R16.2 | length 187.4
  Top Layer w25: R16.2 4763.78,3267.72 Drv4.4
NetDrv4_5: Drv4.5 R15.2 | length 188.8
  Top Layer w25: R15.2@4842.52,3186.18 4901.58,3186.18 4928.74,3159.02 Drv4.5
NetDS1_K: DS1.K R1.1 | length 272.2
  Top Layer w25: v1(6181.1,4527.56) 6200.79,4547.24 R1.1
  Bottom Layer w25: v1(6181.1,4527.56) 6200.79,4547.24 DS1.K
NetDS2_K: DS2.K R3.1 | length 291.9
  Top Layer w25: v1(5708.66,4527.56) 5728.35,4547.24 R3.1
  Bottom Layer w25: v1(5708.66,4527.56) 5728.35,4547.24 DS2.K DS2.K@5728.35,4685.04
NetDS3_K: DS3.K R4.1 | length 272.2
  Top Layer w25: v1(5944.88,4527.56) 5964.57,4547.24 R4.1
  Bottom Layer w25: v1(5944.88,4527.56) 5964.57,4547.24 DS3.K
NetDS4_K: DS4.K R23.1 | length 272.2
  Top Layer w25: v1(6417.32,4527.56) 6437.01,4547.24 R23.1
  Bottom Layer w25: v1(6417.32,4527.56) 6437.01,4547.24 DS4.K
NetIL_sens1_6: IL_sens1.6 J5.2 | length 801.9
  Top Layer w25: IL_sens1.6 4624.41,1553.54 v1(4645.67,1574.8)
  Bottom Layer w25: v1(4645.67,1574.8) 4666.93,1553.54 J5.2
NetIL_sens1_7: IL_sens1.7 R32.2 R33.1 | length 922.1
  Top Layer w25: IL_sens1.7 4575.98,1603.54 4606.3,1633.86 4687.83,1633.86 4803.15,1518.54 R33.1 4881.89,1496.06 4921.26,1456.69 4921.26,1377.95 4960.63,1338.58 R32.2
NetIoutS_1: IoutS.1 R24.2 R25.2 U1.8 U1.9 | length 1976.3
  Top Layer w25: R24.2 R25.2 6653.54,2516.89 v1(6653.54,2460.63) 6653.54,2421.26 6751.97,2322.83 6751.97,1968.5 6785.43,1935.04 6858.27,1935.04 6858.27,1885.04 6904.72,1885.04 v1(6929.13,1909.45)
  Bottom Layer w25: IoutS.1 6318.9,1397.64 6830.71,1909.45 v1(6929.13,1909.45)
NetJ3_1: J3.1 R14.2 S4.1 | length 1495.2
  Top Layer w25: S4.1 6240.16,3031.5 6279.53,3070.87 6279.53,3602.36 6240.16,3641.73 6203.58,3641.73 R14.2
  Bottom Layer w25: S4.1 6161.42,3090.55 J3.1
NetJ3_2: J3.2 R11.2 S3.1 | length 856.8
  Top Layer w25: S3.1 6102.36,3383.03 R11.2
  Bottom Layer w25: S3.1 6259.84,3228.35 J3.2
NetJ3_3: J3.3 R8.2 S2.1 | length 1600.3
  Top Layer w25: S2.1 6200.79,3740.16 6279.53,3818.9 6279.53,4311.02 6242.95,4347.6 R8.2
  Bottom Layer w25: S2.1 6476.38,3366.14 J3.3
NetJ3_4: J3.4 R5.2 S1.1 | length 1128.5
  Top Layer w25: S1.1 6200.79,3996.06 R5.2
  Bottom Layer w25: S1.1 6279.53,3917.32 6279.53,3759.84 6535.43,3503.94 J3.4
NetJ4_1: J4.1 R22.2 U1.1 VinS.1 | length 2083.8
  Top Layer w25: R22.2@6594.49,2362.2 6633.86,2322.83 U1.1
  Bottom Layer w25: v1(6633.86,2263.78) 6653.54,2244.09 7047.24,2244.09 ; VinS.1 6673.23,1555.12 7047.24,1929.13 7047.24,2332.68 6988.19,2391.73 J4.1@6811.02,2391.73
NetJ4_2: J4.2 R31.2 U1.7 VoutS.1 | length 2141.7
  Top Layer w25: VoutS.1@6496.06,1289.37 6496.06,1397.64 6929.13,1830.71 ; R31.2 6633.86,1827.91 U1.7 ; U1.7@6638.58,1885.04 6692.91,1830.71 6929.13,1830.71 ; v1(6988.19,2312.99) 6988.19,1889.76 6929.13,1830.71
  Bottom Layer w25: J4.2 6783.07,2481.89 6722.44,2421.26 6722.44,2342.52 6761.81,2303.15 6978.35,2303.15 v1(6988.19,2312.99)
NetM1_1: M1.1 M1.G R6.1 R7.1 R34.1 | length 2306.8
  Top Layer w25: R34.1 M1.G 3070.87,2165.35 R7.1 R6.1 v1(3228.35,2086.61) ; v1(4192.91,1397.64) 4429.13,1161.42 M1.1
  Bottom Layer w25: v1(3228.35,2086.61) 3228.35,1850.39 3287.4,1791.34 3996.06,1791.34 4035.43,1751.97 4035.43,1555.12 v1(4192.91,1397.64)
NetM2_1: M2.1 M2.G R9.1 R10.1 R38.1 | length 3201.9
  Top Layer w25: R38.1 M2.G 3070.87,2952.76 R10.1 R9.1 3248.03,2933.08 v1(3248.03,2874.01) ; v1(4291.34,1397.64) 4409.45,1279.53 4625.98,1279.53 4704.72,1200.79 M2.1
  Bottom Layer w25: v1(3248.03,2874.01) 3219.78,2845.77 3219.78,2666.04 3602.36,2283.46 3602.36,2165.35 3582.68,2145.67 3582.68,1889.76 3622.05,1850.39 4035.43,1850.39 4094.49,1791.34 4094.49,1594.49 v1(4291.34,1397.64)
NetM3_1: M3.1 M3.G R12.1 R13.1 R35.1 | length 2031.2
  Top Layer w25: R35.1 M3.G 4685.04,2322.83 R13.1 R12.1 4842.52,2312.99 4980.31,2175.2 v1(5059.06,2175.2) ; M3.1 4980.31,1200.79 5059.06,1279.53 5255.91,1279.53 5295.28,1318.9 5295.28,1574.8 5118.11,1751.97 v1(5118.11,1889.76)
  Bottom Layer w25: v1(5059.06,2175.2) 5059.06,1948.82 v1(5118.11,1889.76)
NetM4_1: M4.1 M4.G R15.1 R16.1 R39.1 | length 2603.4
  Top Layer w25: R39.1 M4.G 4685.04,3110.24 R16.1 4783.46,3110.24 4842.52,3051.18 4980.31,2913.39 v1(5059.06,2913.39) ; v1(5196.85,1889.76) 5196.85,1751.97 5354.33,1594.49 5354.33,1299.21 5255.91,1200.79 M4.1
  Bottom Layer w25: v1(5059.06,2913.39) 5059.06,2263.78 5118.11,2204.72 5118.11,1988.19 5196.85,1909.45 v1(5196.85,1889.76)
NetOpto1_1: Opto1.1 R5.1 | length 98.4
  Top Layer w25: Opto1.1 R5.1
NetOpto2_1: Opto2.1 R8.1 | length 98.4
  Top Layer w25: Opto2.1 R8.1
NetOpto3_1: Opto3.1 R11.1 | length 98.4
  Top Layer w25: Opto3.1 R11.1
NetOpto4_1: Opto4.1 R14.1 | length 98.4
  Top Layer w25: Opto4.1 R14.1
NetR19_1: R19.1 U2.7 | length 365.7
  Top Layer w25: U2.7 6127.36,2249.41 6102.36,2224.41 6102.36,2141.97 6157.72,2086.61 R19.1
NetR19_2: R19.2 R21.1 U1.3 | length 361.3
  Top Layer w25: R19.2@6414.53,2085.04 U1.3 ; R19.2 6417.32,2086.61 R21.1
NetR20_1: R20.1 U2.6 | length 142.5
  Top Layer w25: U2.6 6215.16,2199.41 6259.84,2244.09 R20.1
NetR20_2: R20.2 R22.1 U1.2 | length 451.3
  Top Layer w25: R20.2 6517.27,2283.46 ; R22.1 6456.69,2344.04 6517.27,2283.46 ; U1.2 6585.43,2135.04 6574.8,2145.67 6574.8,2225.93 6517.27,2283.46
NetR28_1: R28.1 U3.7 | length 157.8
  Top Layer w25: U3.7 6225.79,1816.34 6259.84,1850.39 R28.1
NetR28_2: R28.2 R30.1 U1.5 | length 364.9
  Top Layer w25: R30.1 6453.9,1774.45 R28.2 6453.9,1886.97 6551.97,1985.04 U1.5
NetR29_1: R29.1 U3.6 | length 370.7
  Top Layer w25: U3.6 6116.73,1766.34 6102.36,1751.97 6102.36,1692.91 6141.73,1653.54 R29.1
NetR29_2: R29.2 R31.1 U1.6 | length 510.3
  Top Layer w25: R29.2 R31.1 ; 6496.06,1653.54 6535.43,1692.91 6535.43,1889.76 6580.71,1935.04 U1.6
NetR32_1: R32.1 U1.10 | length 2137.3
  Top Layer w25: R32.1 5177.17,1338.58 v1(5216.54,1377.95) ; U1.10@6833.86,1985.04 6837.01,1988.19 v1(6929.13,1988.19)
  Bottom Layer w25: v1(5216.54,1377.95) 5275.59,1437.01 6259.84,1437.01 6807.87,1985.04 6811.02,1988.19 v1(6929.13,1988.19)
VIN: C24.1 C25.1 C26.1 C27.1 C28.1 C29.1 D1.K M1.D R17.1 R36.1 Short2.1 Vin.1 | length 3536.2
  Top Layer w25: v1(5314.96,2460.63) 5314.96,2421.26 5354.33,2381.89 R17.1
  Bottom Layer w25: v1(2598.43,1968.5) 3267.72,1299.21 Vin.1 ; v1(3641.73,1909.45) 3660.04,1891.14 4052.31,1891.14 4073.37,1870.08 5059.06,1870.08 5098.43,1830.71 5216.54,1830.71 5314.96,1929.13 v1(5314.96,2460.63)
  other v1: 826.77,2086.61 925.2,2145.67 826.77,2204.72 925.2,2263.78 826.77,2322.83
VIN_SEN: C17.1 Dz1.K R17.2 R18.1 U2.2 | length 741.8
  Top Layer w25: R18.1 5431.1,2283.46 Dz1.K 5511.81,2246.06 v1(5511.81,2303.15) 5649.61,2303.15 5703.35,2249.41 U2.2 ; v1@5509.02,2283.46 R17.2
  Bottom Layer w25: v1(5511.81,2303.15) 5531.5,2303.15 5610.24,2381.89 C17.1
VOUT: C30.1 C31.1 C32.1 M3.D R26.1 R37.1 Vout+1.1 Vout.1 | length 2193.4
  Top Layer w25: R37.1 4251.97,2204.72 v1(4291.34,2165.35) 4232.28,2106.3 C31.1 ; v1(4881.89,1751.97) 4881.89,1830.71 5059.06,2007.87 5314.96,2007.87 R26.1
  Bottom Layer w25: Vout.1 4094.49,1161.42 4212.6,1279.53 4527.56,1279.53 4527.56,1614.17 4606.3,1692.91 4744.09,1692.91 4803.15,1751.97 v1(4881.89,1751.97)
  other v1: 4803.15,1988.19 4960.63,1988.19 4881.89,2066.93 4803.15,2145.67
VOUT_SEN: C22.1 Dz2.K R26.2 R27.1 U3.2 | length 740.7
  Top Layer w25: R27.1 5431.1,1850.39 Dz2.K 5509.02,1810.2 R26.2 ; v1(5511.81,1870.08) 5649.61,1870.08 5703.35,1816.34 U3.2 U3.2@5773.62,1816.34
  Bottom Layer w25: v1(5511.81,1870.08) 5531.5,1870.08 5610.24,1948.82 C22.1
pads on no net: Dz1.NC Dz2.NC J1. Opto1.2 Opto2.2 Opto3.2 Opto4.2 S1. S2. S3. S4. U1.14

## Polygon pours and split planes (outlines as drawn)
VIN on Top Layer "Bottom Layer-No Net" (solid, pour order 8): 1653.54,1023.62 2047.24,1023.62 2047.24,1889.76 1181.1,1889.76 1141.73,1929.13 1141.73,2440.94 1181.1,2480.32 1968.5,2480.32 2047.24,2559.06 2047.24,2795.28 1968.5,2874.02 787.4,2874.02 708.66,2795.28 708.66,1574.8 787.4,1496.06 1574.8,1496.06 1614.17,1456.69 1614.17,1062.99
GND_HV_LS_IN on Top Layer "Bottom Layer-No Net" (solid, pour order 64): 905.88,708.66 709.03,905.51 709.03,4842.52 905.88,5039.37 6260.21,5039.37 6260.21,4685.04 5866.51,4291.34 5866.51,3543.31 5866.51,1732.28 5787.58,1653.36 5472.44,1653.36 5393.79,1574.71 5393.79,708.66
GND_HV_LS_IN on Top Layer "Bottom Layer-No Net" (solid, pour order 10): 2007.87,2440.94 2086.61,2519.68 2086.61,2874.02 2480.32,3267.72 2952.76,3267.72 2952.76,2874.02 2637.8,2874.02 2480.32,2716.54 2480.32,2165.35 2401.57,2086.61 2125.98,2086.61 1981.24,1929.13 1220.47,1929.13 1181.1,1968.5 1181.1,2401.57 1220.47,2440.94
5V_LV on Top Layer "Bottom Layer-No Net" (solid, pour order 66): 7244.09,4842.52 7047.24,5039.37 6732.28,5039.37 6732.28,4881.89 6574.8,4724.41 6259.84,4724.41 6259.84,4566.93 5984.25,4291.34 5984.25,1692.91 5866.14,1574.8 5826.77,1535.43 5590.55,1535.43 5511.81,1456.69 5511.81,708.66 7047.24,708.66 7244.09,905.51 7244.09,2322.83 6889.76,2322.83 6889.76,3582.68 6732.28,3582.68 6732.28,4429.13 7244.09,4429.13
NetD1_A on Top Layer "Bottom Layer-No Net" (solid, pour order 4): 1574.8,708.66 905.51,708.83 708.66,905.68 708.66,1456.86 1535.43,1456.86 1574.8,1417.49
VIN on Top Layer "Bottom Layer-No Net" (solid, pour order 26): 2007.87,1417.32 2185.04,1594.49 3641.73,1594.49 3700.79,1653.54 3700.79,1968.5 3661.42,2007.87 3582.68,2007.87 3503.94,1929.13 3425.2,1929.13 3385.83,1889.76 3267.72,1889.76 3110.24,2047.24 2677.17,2047.24 2165.35,2047.24 2007.87,1889.76
GND_HV_HS_IN on Top Layer "Bottom Layer-No Net" (solid, pour order 30): 2952.76,2165.35 2874.02,2086.61 2755.91,2086.61 2598.43,2086.61 2519.68,2165.35 2519.68,2677.17 2677.17,2834.65 3110.24,2834.65 3267.72,2677.17 3444.88,2677.17 3484.25,2637.8 3484.25,2440.94 3444.88,2401.57 2992.13,2401.57 2952.76,2362.2
GND_HV_LS_OUT on Top Layer "Bottom Layer-No Net" (solid, pour order 34): 3740.16,2952.76 4133.86,2952.76 4133.86,2047.24 4133.86,1811.02 4133.86,1594.49 3799.21,1594.49 3740.16,1653.54
VOUT on Top Layer "Bottom Layer-No Net" (solid, pour order 40): 4173.23,2165.35 4173.23,1811.02 4212.6,1771.65 4370.08,1771.65 4409.45,1732.28 4724.41,1732.28 4763.78,1692.91 4921.26,1692.91 5019.69,1791.34 5019.69,2027.56 4822.83,2224.41 4232.28,2224.41
GND_HV_LS_OUT on Top Layer "Bottom Layer-No Net" (solid, pour order 42): 4566.93,3031.5 4566.93,3346.46 4488.19,3425.2 4055.12,3425.2 3740.16,3110.24 3740.16,2952.76 4133.86,2952.76 4212.6,3031.5
GND_HV_HS_OUT on Top Layer "Bottom Layer-No Net" (solid, pour order 44): 4173.23,2913.39 4251.97,2992.13 4724.41,2992.13 4921.26,2795.28 5078.74,2795.28 5118.11,2755.91 5118.11,2637.8 5078.74,2598.43 4763.78,2598.43 4724.41,2559.06 4566.93,2559.06 4566.93,2519.69 4566.93,2322.83 4527.56,2283.46 4212.6,2283.46 4173.23,2322.83
VIN on Bottom Layer "Bottom Layer-No Net" (solid, pour order 14): 1968.5,2874.02 2047.24,2795.28 2047.24,2480.32 1181.1,2480.32 1141.73,2440.94 1141.73,1929.13 1181.1,1889.76 1889.76,1889.76 2047.24,1732.28 2047.24,1574.8 1968.5,1496.06 787.4,1496.06 708.66,1574.8 708.66,2755.91 826.77,2874.02
GND_HV_LS_OUT on Bottom Layer "Bottom Layer-No Net" (solid, pour order 70): 708.66,4842.52 905.51,5039.37 6259.84,5039.37 6259.84,4685.04 6023.62,4448.82 5826.77,4251.97 5826.77,1653.54 5393.7,1220.47 5393.7,708.66 905.51,708.66 708.66,905.51
5V_LV on Bottom Layer "Bottom Layer-No Net" (solid, pour order 68): 7244.09,4842.52 7047.24,5039.37 6338.58,5039.37 6338.58,4685.04 6181.1,4527.56 5905.51,4251.97 5905.51,1614.17 5472.44,1181.1 5472.44,708.66 7047.24,708.66 7244.09,905.51
GND_HV_HS_OUT on Bottom Layer "Bottom Layer-No Net" (solid, pour order 50): 1692.91,3937.01 2007.87,3937.01 2480.32,3464.57 2834.65,3464.57 3622.05,2677.17 4094.49,2677.17 4173.23,2598.43 4173.23,2322.83 4232.28,2263.78 4507.87,2263.78 4566.93,2322.83 4566.93,2992.13 4488.19,3070.87 3779.53,3070.87 2992.13,3858.27 2637.8,3858.27 2007.87,4488.19 1692.91,4488.19 1653.54,4448.82 1653.54,3976.38
GND_HV_HS_IN on Bottom Layer "Bottom Layer-No Net" (solid, pour order 52): 708.66,3110.24 826.77,2992.13 905.51,2992.13 1929.13,2992.13 2125.98,2795.28 2362.2,2559.06 2362.2,2165.35 2440.94,2086.61 2677.17,2086.61 2755.91,2165.35 2755.91,2716.54 1929.13,3543.31 787.4,3543.31 708.66,3464.57
GND_HV_LS_OUT on Bottom Layer "Bottom Layer-No Net" (solid, pour order 56): 2834.65,4291.34 2519.69,4606.3 2519.69,4842.52 2440.94,4921.26 1102.36,4921.26 1023.62,4842.52 1023.62,4606.3 1102.36,4527.56 2047.24,4527.56 2677.17,3897.64 2992.13,3897.64 3740.16,3149.61 4094.49,3149.61 4173.23,3228.35 4173.23,3307.09 3740.16,3740.16 3740.16,4212.6 3661.42,4291.34
VOUT on Bottom Layer "Bottom Layer-No Net" (solid, pour order 58): 2874.02,4330.71 2559.06,4645.67 2559.06,4842.52 2637.8,4921.26 3700.79,4921.26 4173.23,4448.82 4173.23,4212.6 4173.23,3937.01 5000,3110.24 5000,2047.24 5019.69,2027.56 5019.69,1948.82 4960.63,1889.76 4251.97,1889.76 4173.23,1968.5 4173.23,2165.35 4232.28,2224.41 4547.24,2224.41 4606.3,2283.46 4606.3,2952.76 3779.53,3779.53 3779.53,4251.97 3700.79,4330.71
GND_HV_LS_IN on Bottom Layer "Bottom Layer-No Net" (solid, pour order 12): 1968.5,2440.94 1220.47,2440.94 1181.1,2401.57 1181.1,1968.5 1220.47,1929.13 1929.13,1929.13 2086.61,1771.65 2086.61,905.51 2165.35,826.77 2519.68,826.77 2559.06,866.14 2559.06,1850.39
GND_HV_HS_OUT on Bottom Layer "Bottom Layer-No Net" (solid, pour order 62): 1614.17,3976.38 1614.17,4448.82 1574.8,4488.19 787.4,4488.19 708.66,4409.45 708.66,4015.75 787.4,3937.01 1574.8,3937.01

## Other copper
Top Layer:
  rectangle net VIN: 1712.6,1062.99 2047.24,1496.06
  region net NetD1_A: 1414.57,1433.86 1414.57,1330.86 1555.83,1330.86 1555.83,1433.86
  region net NetD1_A: 1552.36,1122.05 1552.36,1225.04 1411.1,1225.04 1411.1,1122.05
  rectangle net GND_HV_HS_IN: 2775.59,2135.83 2878.59,2277.09
  rectangle net GND_HV_LS_IN: 2775.59,2923.23 2878.59,3064.49
  rectangle net GND_HV_LS_OUT: 4389.76,3080.71 4492.76,3221.97
  rectangle net GND_HV_HS_OUT: 4389.76,2293.31 4492.76,2434.57
  rectangle net VOUT: 4291.34,1751.97 4783.46,2165.35
  rectangle net VIN: 2696.85,1594.49 3169.29,2007.87
  rectangle net GND_HV_HS_IN: 2696.85,2401.57 3169.29,2795.28
  rectangle net GND_HV_HS_OUT: 4311.02,2539.37 4783.46,2952.76
  rectangle net GND_HV_LS_OUT: 4960.63,3129.92 5088.58,3208.66
  rectangle net GND_HV_HS_OUT: 4960.63,2381.89 5088.58,2460.63
  rectangle net GND_HV_HS_IN: 3346.46,2185.04 3474.41,2263.78
  rectangle net GND_HV_LS_OUT: 4960.63,3129.92 5049.21,3405.51
  rectangle net GND_HV_HS_OUT: 4960.63,2381.89 5049.21,2687.01
  rectangle net GND_HV_HS_IN: 3346.46,2185.04 3435.04,2490.16
  rectangle net GND_HV_LS_IN: 3346.46,2972.44 3474.41,3051.18
  rectangle net GND_HV_LS_IN: 3346.46,2972.44 3435.04,3277.56
  region net GND_HV_LS_IN: 2229.33,890.75 2322.83,984.25 2180.12,1126.97 2086.61,1033.46
  rectangle net GND_HV_LS_IN: 2204.72,787.4 2519.68,1141.73
  rectangle net NetD1_A: 1062.99,826.77 1377.95,1141.73
  rectangle net VIN: 708.66,1496.06 885.83,1669.77
  rectangle net VIN: 748.03,1597.95 925.2,1771.65
  rectangle net NetD1_A: 728.35,1279.53 925.2,1456.69
  rectangle net GND_HV_LS_IN: 3917.32,1456.69 4133.86,1564.96
  rectangle net GND_HV_LS_OUT: 3956.69,1594.49 4133.86,1712.6
  rectangle net VIN: 826.77,1496.06 1003.94,1669.77
  rectangle net GND_HV_LS_IN: 3917.32,1476.38 4035.43,1555.12
  rectangle: 5944.88,2598.43 6023.62,2834.65
  rectangle net GND_HV_HS_OUT: 4311.02,2500 4448.82,2578.74
  rectangle net VOUT: 4192.91,1751.97 4330.71,1811.02
  pour cut-out: 1377.95,708.66 1377.95,866.14 1537.56,1025.74 2086.61,1025.74 2086.61,905.51 2204.72,787.4 2519.68,787.4 2795.28,1062.99 2913.39,1181.1 5354.33,1181.1 5511.81,1023.62 5511.81,708.66
  pour cut-out: 3031.5,5039.37 3031.5,4685.04 2913.39,4566.93 711.42,4566.93 708.66,4564.17 708.66,4842.52 905.51,5039.37
  text "12in" at 5846.46,5000 h78.74 r225
  text "12out" at 6102.36,5000 h78.74 r225
  text "+12V-" at 5629.92,4980.31 h98.43 r180
  text "5HV" at 6338.58,4980.31 h78.74 r225
  text "5LV" at 6594.49,4980.31 h78.74 r225
  text "+Vout-" at 2559.06,4881.89 h196.85 r180
  text "5V LV" at 6751.97,4291.34 h78.74
  text "5V HV" at 6751.97,4114.17 h78.74
  text "12 out" at 6751.97,3956.69 h78.74
  text "12 in" at 6751.97,3799.21 h78.74
  text "12V" at 6751.97,3641.73 h78.74
  text "1" at 6968.5,3464.57 h78.74
  text "2" at 6948.82,3326.77 h78.74
  text "3" at 6948.82,3188.98 h78.74
  text "PWM in" at 7125.98,3070.87 h78.74 r90
  text "4" at 6948.82,3051.18 h78.74
  text "5V" at 6929.13,2864.17 h70.87
  text "I50k" at 6929.13,2765.75 h70.87
  text "GND" at 6929.13,2667.32 h70.87
  text "I500" at 6929.13,2568.9 h70.87
  text "Vout" at 6929.13,2470.47 h70.87
  text "Vin" at 6929.13,2372.05 h70.87
  text "IL Sen" at 5944.88,1053.15 h70.87
  text "Lin" at 2952.76,826.77 h78.74 r45
  text "Vin" at 3228.35,826.77 h78.74 r45
  text "+Vin-" at 1437.01,787.4 h157.48
  text "Lout" at 3759.84,787.4 h78.74 r45
  text "Vout" at 4035.43,787.4 h78.74 r45
  text "80k" at 5866.14,787.4 h70.87 r60
  text "500" at 6033.46,787.4 h70.87 r60
  text "Raw" at 6200.79,787.4 h70.87 r60
  text "PWM1" at 4350.39,767.72 h78.74 r45
  text "PWM2" at 4625.98,767.72 h78.74 r45
  text "PWM3" at 4901.57,767.72 h78.74 r45
  text "PWM4" at 5177.17,767.72 h78.74 r45
  text "GNDin" at 2637.8,748.03 h78.74 r45
  text "GND LV" at 5472.44,748.03 h70.87 r60
  text "GNDsen" at 5649.61,748.03 h70.87 r60
  text "Vo Sen" at 6358.27,748.03 h70.87 r60
  text "Vi Sen" at 6535.43,748.03 h70.87 r60
  text "GNDout" at 3425.2,728.35 h70.87 r45
Bottom Layer:
  rectangle net GND_HV_HS_IN: 1417.32,3228.35 1574.8,3464.57
  rectangle net GND_HV_HS_OUT: 1417.32,3946.85 1574.8,4183.07
  rectangle net GND_HV_HS_OUT: 1732.28,4212.6 1968.5,4448.82
  rectangle net GND_HV_HS_OUT: 944.88,4212.6 1181.1,4448.82
  rectangle net GND_HV_LS_OUT: 3464.57,4015.75 3700.79,4251.97
  rectangle net VOUT: 3464.57,4409.45 3700.79,4645.67
  rectangle net VOUT: 2637.8,4606.3 2952.76,4921.26
  rectangle net GND_HV_LS_OUT: 1062.99,4606.3 1377.95,4921.26
  rectangle net GND_HV_LS_IN: 2204.72,826.77 2519.68,1141.73

## Silkscreen, mask and mechanical layers (free items; w line width, h text height)
Top Overlay:
  lines w10: 2559.05,3661.42 2559.06,3661.42 ; 2559.05,3661.42 4921.26,3661.42 4921.26,1299.21 2559.05,1299.21 2559.05,3661.42